# Altium PCB PCB1.pcbdoc
Units mil, origin at the board's own origin, x right, y up, seen from the top; angles counter-clockwise.
Board outline 4968.58 x 2525 mil, 2 copper layers (Top Layer, Bottom Layer); 5 components, 5 nets, 16 pads, 3 vias.
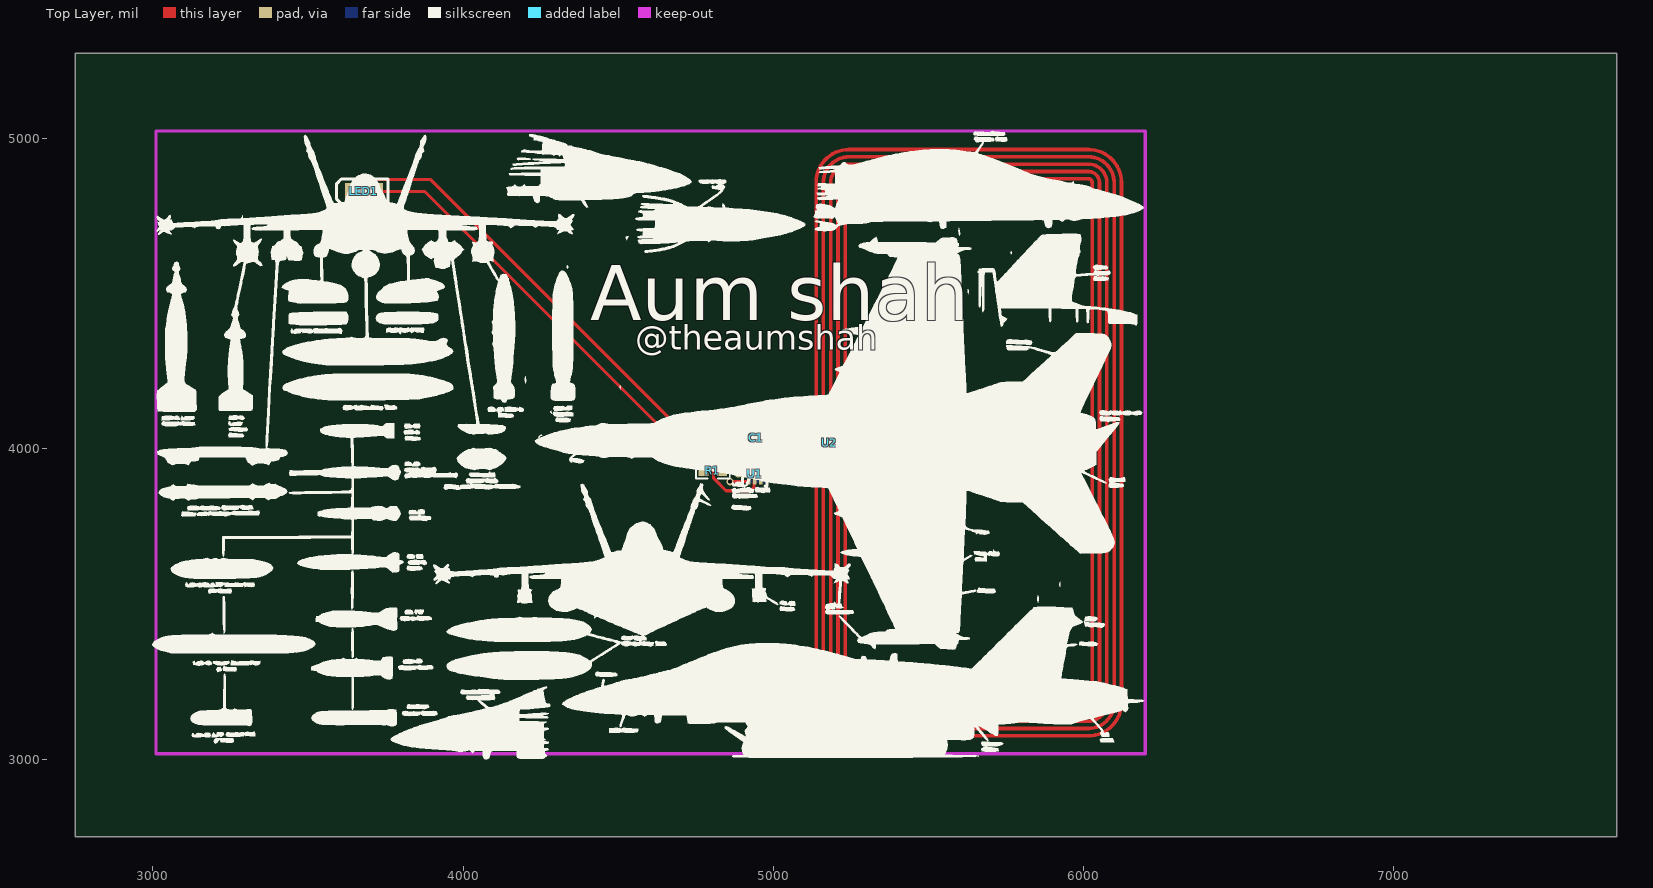
[diagram p0: Top Layer view]
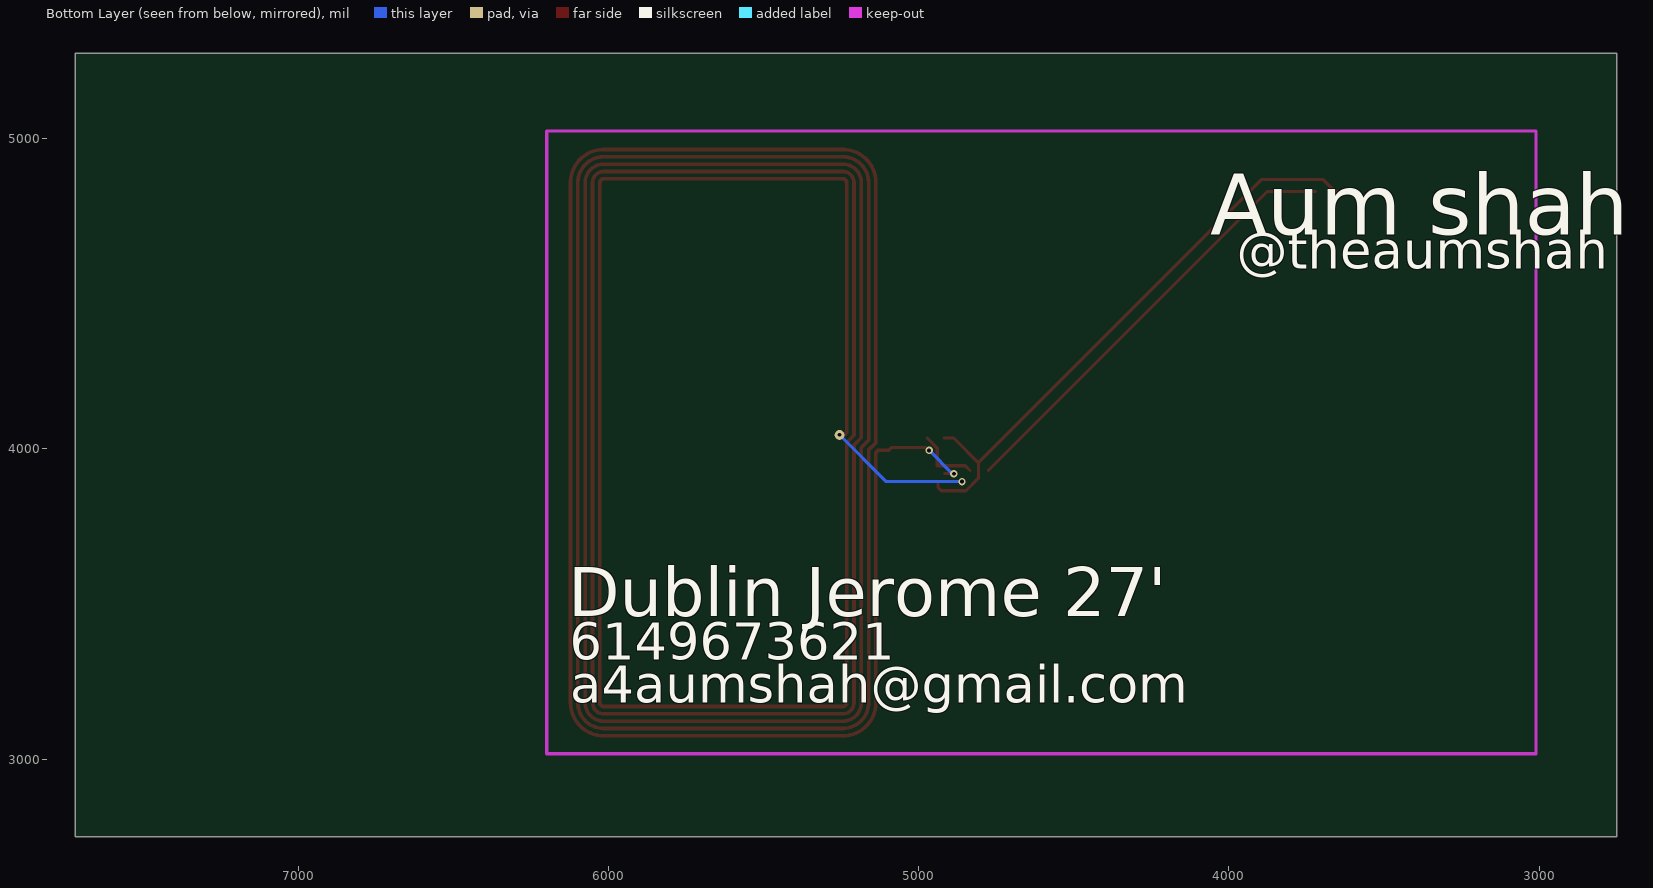
[diagram p1: Bottom Layer view, seen from below]

## Layer stack, top to bottom
Top Layer: signal copper (thickness not stored)
Dielectric: dielectric 12.6, FR-4, Dk 4.8
Bottom Layer: signal copper (thickness not stored)

## Board outline
7718.58,2750 2750,2750 2750,5275 7718.58,5275

## Design rules (kind name [scope] priority, off if disabled: settings)
BoardOutlineClearance copperThickness1oz [All] p0: genericclearance=10 ignorepadtopadclearanceinfootprint=FALSE except(0: Arc-SplitContinuation Track-SplitContinuation SMDPad-SplitContinuation THPad-SplitContinuation Via-SplitContinuation Fill-SplitContinuation Poly-SplitContinuation Region-SplitContinuation Text-SplitContinuation; 6: Track-CutoutEdge SMDPad-CutoutEdge THPad-CutoutEdge Via-CutoutEdge Region-CutoutEdge; 11.8: Track-OutlineEdge SMDPad-OutlineEdge THPad-OutlineEdge Via-OutlineEdge Fill-OutlineEdge Region-OutlineEdge Poly-OutlineEdge Text-OutlineEdge Fill-CutoutEdge)
BoardOutlineClearance copperThickness2oz [All] p0: genericclearance=10 ignorepadtopadclearanceinfootprint=FALSE except(0: Arc-SplitContinuation Track-SplitContinuation SMDPad-SplitContinuation THPad-SplitContinuation Via-SplitContinuation Fill-SplitContinuation Poly-SplitContinuation Region-SplitContinuation Text-SplitContinuation; 6: Track-CutoutEdge SMDPad-CutoutEdge THPad-CutoutEdge Via-CutoutEdge Region-CutoutEdge; 11.8: Track-OutlineEdge SMDPad-OutlineEdge THPad-OutlineEdge Via-OutlineEdge Fill-OutlineEdge Region-OutlineEdge Poly-OutlineEdge Text-OutlineEdge Fill-CutoutEdge)
Clearance copperThickness1oz [(InNet('$1N600') OR InNet('$1N610') OR InNet('$1N606') OR InNet('$1N562') OR InNet('$1N557'))] p1: gap=7 ignorepadtopadclearanceinfootprint=FALSE except(4: Track-Track; 6: Track-SMDPad SMDPad-SMDPad Track-THPad SMDPad-THPad THPad-THPad Track-Via SMDPad-Via THPad-Via Via-Via SMDPad-Fill THPad-Fill Via-Fill Fill-Fill Track-Region SMDPad-Region THPad-Region Via-Region Region-Region Track-Poly SMDPad-Poly THPad-Poly Via-Poly Fill-Poly Region-Poly Poly-Poly Track-Text SMDPad-Text THPad-Text Via-Text Fill-Text Region-Text Poly-Text Text-Text; 6.9: Track-Hole SMDPad-Hole THPad-Hole Via-Hole Fill-Hole Region-Hole Poly-Hole Text-Hole Sheet-Hole; 11.8: Track-Fill Fill-Region Track-Sheet SMDPad-Sheet THPad-Sheet Via-Sheet Fill-Sheet Region-Sheet Poly-Sheet Text-Sheet)
Clearance copperThickness2oz [All] p1: gap=7 ignorepadtopadclearanceinfootprint=FALSE except(6: Track-SMDPad SMDPad-SMDPad Track-THPad SMDPad-THPad THPad-THPad Track-Via SMDPad-Via THPad-Via Via-Via SMDPad-Fill THPad-Fill Via-Fill Fill-Fill Track-Region SMDPad-Region THPad-Region Via-Region Region-Region Track-Poly SMDPad-Poly THPad-Poly Via-Poly Fill-Poly Region-Poly Poly-Poly Track-Text SMDPad-Text THPad-Text Via-Text Fill-Text Region-Text Poly-Text Text-Text; 6.9: Track-Hole SMDPad-Hole THPad-Hole Via-Hole Fill-Hole Region-Hole Poly-Hole Text-Hole Sheet-Hole; 8: Track-Track; 11.8: Track-Fill Fill-Region Track-Sheet SMDPad-Sheet THPad-Sheet Via-Sheet Fill-Sheet Region-Sheet Poly-Sheet Text-Sheet)
DiffPairsRouting differentialPair [All] p1: maxuncoupledlength=10 minlimit=6 maxlimit=6 mostfreqgap=6 toplayer_minwidth=5 toplayer_prefwidth=10 toplayer_maxwidth=100 bottomlayer_minwidth=5 bottomlayer_prefwidth=10 bottomlayer_maxwidth=100
PasteMaskExpansion pasteMaskExpansion [All] p1: expansion=0
PlaneConnect innerPlane [All] p1: planeconnectstyle=Relief reliefexpansion=20 reliefentries=4 reliefconductorwidth=10 reliefairgap=10
PolygonConnect copperRegion [All] p1: connectstyle=Relief reliefentries=4 reliefconductorwidth=10 polygonreliefangle="90 Angle" airgapwidth=10
RoutingVias viaSize [All] p1: viastyle="Through Hole" holewidth=12.0078 minholewidth=11.811 maxholewidth=248.0314 width=24.0158 minwidth=19.685 maxwidth=393.7008
SolderMaskExpansion solderMaskExpansion [All] p1: useseparateexpansions=TRUE expansion=2 expansionbottom=2
Width copperThickness1oz [All] p1: maxlimit=100 minlimit=5 preferedwidth=10
Width copperThickness2oz [All] p1: maxlimit=100 minlimit=8 preferedwidth=10

## Components (designator, comment, footprint, x,y, rotation, side; value= is the part's Value field where it differs from the comment)
C1 "CL10B224KA8NNNC" C0603 4945,4035 r0 top
LED1 "KT-0805Y" LED0805-R-RD 3680,4830 r0 top
R1 "0603WAF470JT5E" R0603 4805,3930 r0 top
U1 "NT3H2111W0FHKH" XQFN-8_L1.6-W1.6-P0.50-BL_NT3H2111W0FHKH 4940,3920 r0 top
U2 "25X48MM_NFC_ANTENNA" 25X48MM_NFC_ANTENNA 5630,4020 r90 top

## Footprints (in the part's own frame and the unit in brackets; to place one, negate y for a bottom-side part, rotate by r counter-clockwise, add the part's x,y. Pads: shape width x height; smd on the part's side, far side on the other; paste and mask are expansions set on the pad)
25X48MM_NFC_ANTENNA [mm]
  rect 0.3x0.75 smd: P$1(-0.635,13.335)
  round 0.808 hole 0.3: P$2(0.635,9.525)
  Top Layer lines w0.3: -0.635,13.462 -0.635,13.335 -0.635,12.665 -0.8,12.5 -21.3,12.5 ccw(c-21.3,9.8) -24,9.8 -24,-9.8 ccw(c-21.3,-9.8) -21.3,-12.5 21.3,-12.5 ccw(c21.3,-9.8) 24,-9.8 24,9.8 ccw(c21.3,9.8) 21.3,12.5 0,12.5 -0.6,11.9 -21.3,11.9 ccw(c-21.3,9.8) -23.4,9.8 -23.4,-9.8 ccw(c-21.3,-9.8) -21.3,-11.9 21.3,-11.9 ccw(c21.3,-9.8) 23.4,-9.8 23.4,9.8 ccw(c21.3,9.8) 21.3,11.9 0.2,11.9 -0.4,11.3 -21.3,11.3 ccw(c-21.3,9.8) -22.8,9.8 -22.8,-9.8 ccw(c-21.3,-9.8) -21.3,-11.3 21.3,-11.3 ccw(c21.3,-9.8) 22.8,-9.8 22.8,9.8 ccw(c21.3,9.8) 21.3,11.3 0.4,11.3 -0.2,10.7 -21.3,10.7 ccw(c-21.3,9.8) -22.2,9.8 -22.2,-9.8 ccw(c-21.3,-9.8) -21.3,-10.7 21.3,-10.7 ccw(c21.3,-9.8) 22.2,-9.8 22.2,9.8 ccw(c21.3,9.8) 21.3,10.7 0.6,10.7 0,10.1 -21.3,10.1 ccw(c-21.3,9.8) -21.6,9.8 -21.6,-9.8 ccw(c-21.3,-9.8) -21.3,-10.1 21.3,-10.1 ccw(c21.3,-9.8) 21.6,-9.8 21.6,9.8 ccw(c21.3,9.8) 21.3,10.1 0.8,10.1 0.635,9.935 0.635,9.525
C0603 [mm]
  rect 0.8x0.9 smd: 1(-0.7,0) 2(0.7,0)
  silkscreen extent -1.39,-0.71 1.39,0.71
LED0805-R-RD [mm]
  rect 1x1.4 smd: 1(1.05,0) 2(-1.05,0)
  silkscreen extent -2.22,-1.04 1.99,1.01
R0603 [mil]
  rect 31.75x34.02 smd: 1(-29.66,0) 2(29.66,0)
  silkscreen extent -55,-26 55,26
XQFN-8_L1.6-W1.6-P0.50-BL_NT3H2111W0FHKH [mm]
  rect 0.28x0.5 smd: 1(-0.5,-0.65) 2(0,-0.65) 3(0.5,-0.65) 5(0.5,0.65) 6(0,0.65) 7(-0.5,0.65)
  rect 0.45x0.3 smd: 4(0.6,0) 8(-0.6,0)
  silkscreen extent -1,-1.33 1,1

## Via types
v1: diameter 24.02, hole 12.01, Top Layer to Bottom Layer, 3 vias

## Nets (pads, with @x,y where several pads share a name; then routed paths per layer and width w, separated by ;. In a path a pad name is that pad's centre, name@x,y a point inside that pad or via, vN(x,y) a via of type N, cw(c..) or ccw(c..) an arc to the next point about the centre after c; other vN are vias at no path point)
$1N557: U1.1 U2.P$2 | length 517.1
  Top Layer w10: v1(4860.32,3894.41) U1.1
  Bottom Layer w10: v1(4860.32,3894.41) 5104.41,3894.41 U2.P$2
$1N562: U1.8 U2.P$1 | length 288
  Top Layer w10: v1(4886.38,3920) U1.8 ; v1(4966.38,3995) 4976.38,4005 5086.38,4005 5096.38,3995 U2.P$1
  Bottom Layer w10: v1(4886.38,3920) 4891.38,3920 v1(4966.38,3995)
$1N600: C1.2 R1.2 U1.6 U1.7 | length 214.7
  Top Layer w10: R1.2 4850.25,3945.59 U1.7 U1.6 4940,4002.44 C1.2
$1N606: LED1.1 R1.1 | length 1426.8
  Top Layer w10: LED1.1 3875.34,4830 R1.1
$1N610: C1.1 LED1.2 U1.2 | length 1927.5
  Top Layer w10: LED1.2 3658.58,4830 3697.12,4868.53 3893.91,4868.53 4807.44,3955 ; C1.1 4887.44,4035 4807.44,3955 ; U1.2 4937.44,3891.85 4937.44,3875 4927.44,3865 4847.44,3865 4807.44,3905 4807.44,3955
pads on no net: U1.3 U1.4 U1.5

## Keep-outs
Board Outline Layer:
  lines w10: 3010,3017.13 6198.98,3017.13 6198.98,5025 3010,5025 3010,3017.13

## Silkscreen, mask and mechanical layers (free items; w line width, h text height)
Top Silkscreen Layer:
  drawing of 151 lines, arcs and shapes, not listed
  text "Aum shah" at 4410,4415 h177.17
  text "@theaumshah" at 4555,4320 h78.74
Bottom Silkscreen Layer:
  text "Aum shah" at 4060,4690 h196.85
  text "@theaumshah" at 3975,4580 h120
  text "Dublin Jerome 27'" at 6130,3460 h157.48
  text "6149673621" at 6125,3320 h120
  text "a4aumshah@gmail.com" at 6123.95,3181.42 h120